# EAGLE board after (EAGLE 9.1.0)
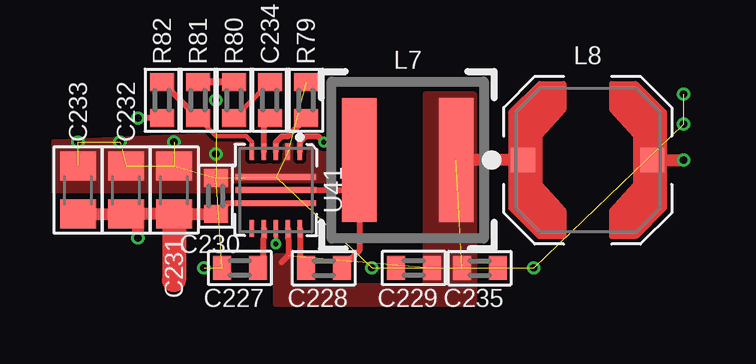
[diagram p0: board, top side]
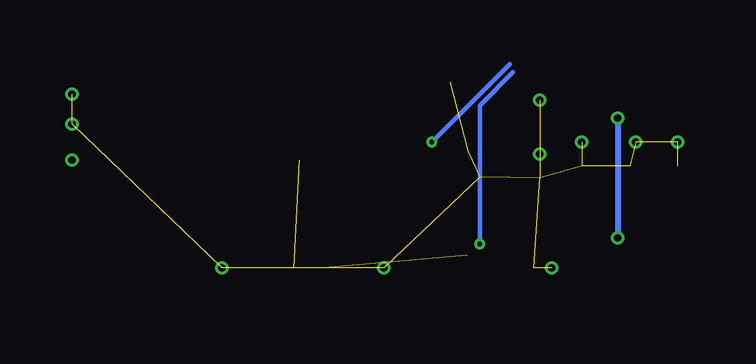
[diagram p1: board, bottom side, seen from below]

No outline drawn. Coordinates in mm, seen from the top.
Copper layers (1*16): Top 0.035559375mm / dielectric 10mil / Bottom 0.035559375mm
Design rules "Twinleaf 4 Layer, 5 mil *": minimum track width 6mil, minimum drill 0.2mm, track to track 6mil, track to pad 6mil, pad to pad 6mil, via to via 6mil, smd to smd 1mil, copper to edge 15mil, drill to drill 10mil, minimum pad ring 5mil, minimum via ring 5mil, stop-mask expansion 1mil, vias tented up to drill 40mil, thermal gap 5mil
Net classes: 1 lvds: width 0.292 mm, drill 0.2 mm, clearance 0.127 mm; 2 delete: width 0.127 mm, drill 0.2 mm, clearance 0.152 mm

## Footprints (pad centres in the part's own frame; a part is rotated, then mirrored left to right if it is on the bottom)
0603 = smd 0.75 x 1: 1 -0.75,0; 2 0.75,0
0805 = smd 1.2 x 1.5: 1 -1,0; 2 1,0
X60 = smd 1.422 x 5.182: 1 -2.019,0; 2 2.019,0
LPS6235 = smd 1 x 1: 1 -2.7,0; 2 2.7,0
VSON = smd 0.7 x 0.25: 1 -1.6,1; 2 -1.6,0.5; 3 -1.6,0; 4 -1.6,-0.5; 5 -1.6,-1; 9 1.6,-1; 10 1.6,-0.5; 11 1.6,0; 12 1.6,0.5; 13 1.6,1 | smd 0.25 x 3.4: 6 -0.55,0; 7 0,0; 8 0.55,0

## Placement (x,y rotation side)
C227  4.7u  [0603]  78.5,18.75 180 top
C228  1u  [0603]  82,18.75 0 top
C229  22u  [0603]  85.75,18.75 180 top
C230  10u  [0603]  77.5,21.75 90 top
C231  22u  [0805]  75.75,22 90 top
C232  22u  [0805]  73.75,22 90 top
C233  22u  [0805]  71.75,22 90 top
C234  4.7n  [0603]  79.75,25.75 90 top
C235  22u  [0603]  88.5,18.75 0 top
L7  3.3u  [X60]  85.5,23.25 0 top
L8  100u  [LPS6235]  93,23.25 0 top
R79  50k  [0603]  81.25,25.75 270 top
R80  13.3k  [0603]  78.25,25.75 270 top
R81  78.7k  [0603]  76.75,25.75 270 top
R82  665k  [0603]  75.25,25.75 270 top
U41  TPS611781  [VSON]  80,22 270 top

## Library data of the parts
C227 = capacitors; MANUF: Murata; PARTNUM: GRM188R6YA475KE15D; TOLERANCE: 20%; TYPE: X5R; VOLTAGE: 35V
C228 = capacitors; MANUF: Yageo; PARTNUM: CC0603KRX5R8BB105; TOLERANCE: 10%; TYPE: X5R; VOLTAGE: 25V
C229 C235 = capacitors; MANUF: TDK; PARTNUM: C1608X5R0J226M080AC; TOLERANCE: 20%; TYPE: X5R; VOLTAGE: 10V
C230 = capacitors; MANUF: Samsung; PARTNUM: CL10A106MO8NQNC; TOLERANCE: 20%; TYPE: X5R; VOLTAGE: 16V
C231-C233 = capacitors; MANUF: Samsung; PARTNUM: CL21A226MAQNNNE; TOLERANCE: 20%; TYPE: X5R; VOLTAGE: 25V
C234 = capacitors; MANUF: TDK; PARTNUM: C1608NP01H472J080AA; TOLERANCE: 5%; TYPE: NP0; VOLTAGE: 50V
L7 = inductor; MANUF: Coilcraft; PARTNUM: XAL6030-332M
L8 = inductor; DCR: .375; MANUF: Coilcraft; PARTNUM: LPS6235-104MRB
R79 = resistors; MANUF: PANASONIC; PARTNUM: ERJ-3EKF4992V; TOLERANCE: 1%; TYPE: THICK FILM
R80 = resistors; MANUF: Panasonic; PARTNUM: ‎ERJ-3EKF1332V‎; TOLERANCE: 1%; TYPE: THICK FILM
R81 = resistors; MANUF: Yageo; PARTNUM: RC0603FR-0778K7L; TOLERANCE: 1%; TYPE: THICK FILM
R82 = resistors; MANUF: Yageo; PARTNUM: RC0603FR-07665KL; TOLERANCE: 1%; TYPE: THICK FILM
U41 = regulators; MANUF: TI; PARTNUM: TPS611781RNWT

## Nets
BOOST-EN: U41.11
GND: C227.2 C229.2 C230.2 C231.2 C232.2 C233.2 C235.2 R79.1 R80.1 R81.1 U41.2 U41.6
N$000092: R79.2 U41.3
N$000093: C227.1 U41.10
N$000096: C228.2 L7.1 U41.7
N$000098: C228.1 U41.13
N$000099: C234.2 R80.2
N$000100: C234.1 U41.4
N$000101: R81.2 R82.1 U41.5
P5VFILT: C229.1 C235.1 L7.2 L8.1 U41.12
P5VIN: L8.2
P10V: C230.1 C231.1 C232.1 C233.1 R82.2 U41.8
TIM4_CH3_BOOST_2MHZ: U41.1

## Tracks (layer width: path | path; a pad name or v marks a point on that pad's centre or on a via)
BOOST-EN  (via drill 0.2)
  Top 0.18: U41.11 v80,19.75
  Bottom 0.18: v80,19.75 80,25.53 78.61,26.92
GND  (via drill 0.3)  (19 unrouted)
  Top 0.18: 77.5,26.5 v77.5,25.75
  Top 0.3: R80.1 77.5,26.5 R81.1
  other vias: 97,24.75 97,26 77,18.75 75.75,24 73.5,24 71.75,24 84,18.75 77.5,23.5 90.75,18.75
  pour Top (no thermals): 82,24.25 77.25,24.25 70.75,23.99 70.75,22 82,22
N$000092
  Top 0.25: U41.3 80,24 80.25,24.25 80.5,24.25 R79.2
N$000093
  Top 0.25: U41.10 79.5,20 79.47,19.97 79.47,18.97 C227.1
N$000096
  Top 0.25: U41.7 83.25,22 83.5,22.25 83.5,23.23 L7.1 83.48,19.48 C228.2
N$000098
  Top 0.25: U41.13 81,19 C228.1
N$000099
  Top 0.18: C234.2 R80.2
N$000100
  Top 0.25: U41.4 79.5,24.75 C234.1
N$000101
  Top 0.18: U41.5 79,24 78.75,24.25 77.5,24.25 R81.2
  Top 0.25: R81.2 R82.1
P5VFILT  (3 unrouted)
  Top 0.25: U41.12 80.5,20 80.53,19.97 80.53,19.28 80.25,19
  Top 0.5: L8.1 L7.2
  pour Top (no thermals): 88.25,26 88.25,17.25 80,17.25 80,19.25 80.75,19.25 80.75,18 86.25,18 86.25,26
P5VIN  (via drill 0.3)
  Top 0.5: L8.2 v97,23.25
P10V  (via drill 0.3)
  Top 0.25: R82.2 v74.25,25 | U41.8 77.95,21.45 C230.1
  Top 0.5: C230.1 C231.1 74.25,21 | C233.1 C232.1 74.25,21 | v74.25,20 74.25,21
  Top 1: C231.1 75.75,18.25
  Bottom 0.25: v74.25,25 v74.25,20
TIM4_CH3_BOOST_2MHZ  (via drill 0.2)
  Top 0.25: U41.1 81,24 81.25,24.25 81.75,24.25 v82,24
  Bottom 0.18: 78.75,27.25 v82,24